# EAGLE board BMSV1.0 (EAGLE 9.2.1), part 1 of 2
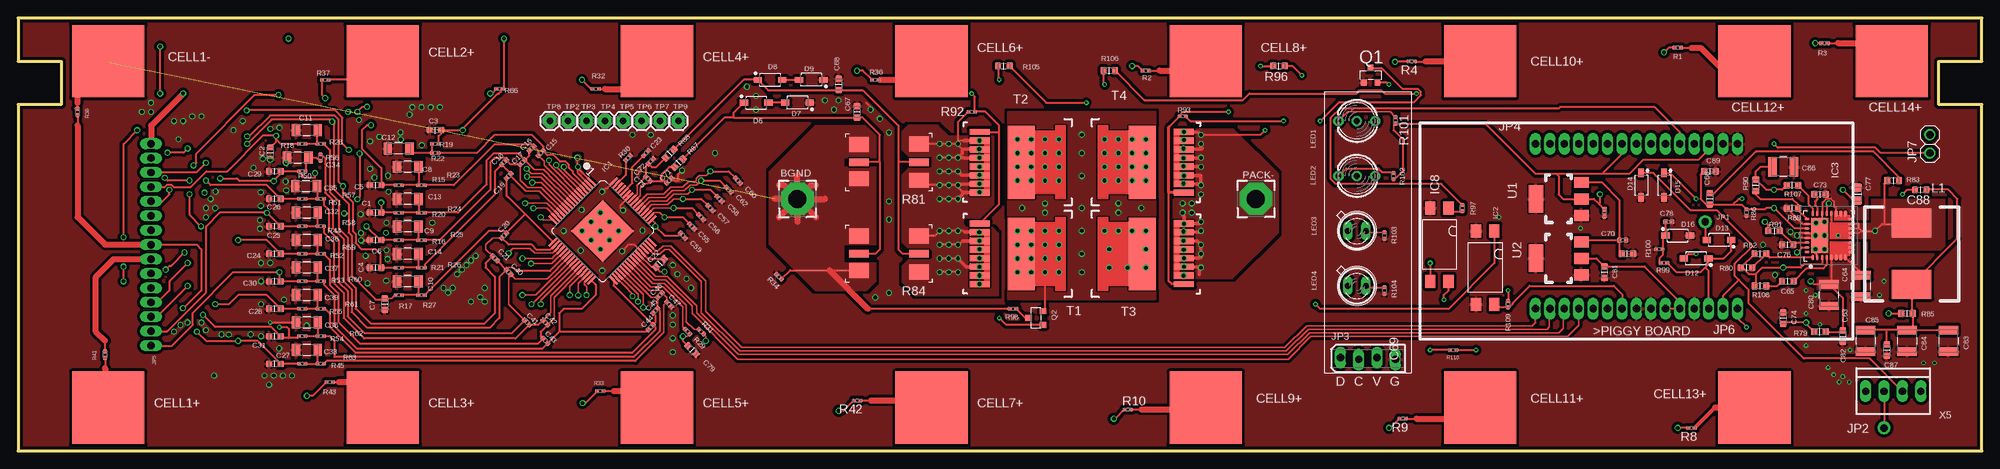
[diagram p0: board, top side]
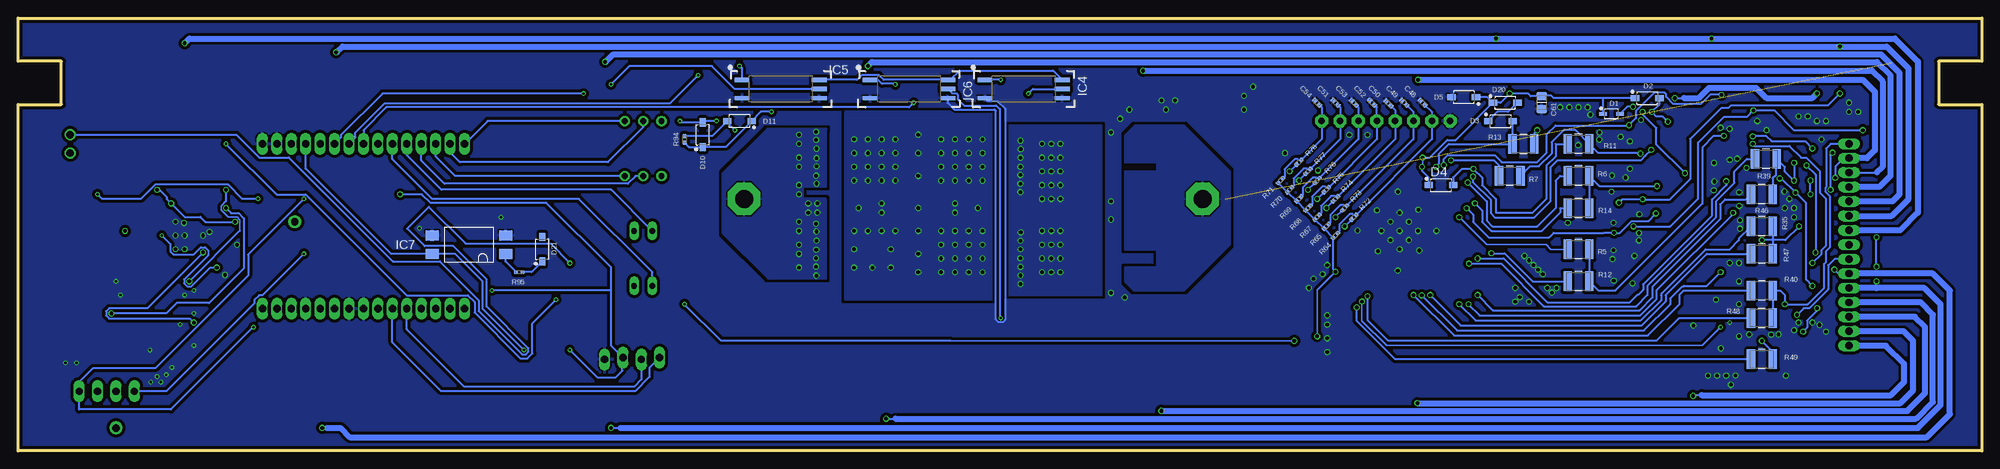
[diagram p1: board, bottom side, seen from below]

Size 272 x 60 mm. Coordinates in mm from the lower left corner, seen from the top.
Outline: 0,0 272,0 272,48 266,48 266,54 272,54 272,60 0,60 0,54 6,54 6,48 0,48 0,0
Copper layers (1*16): Top 0.035mm / dielectric 1.5mm / Bottom 0.035mm
Design rules "SeeedStudio_2layer_DRU_no_angle_20140221 *": minimum track width 6mil, minimum drill 12mil, track to track 10mil, track to pad 8mil, pad to pad 6mil, via to via 10mil, smd to smd 0mil, copper to edge 10mil, drill to drill 10mil, minimum pad ring 10mil, minimum via ring 6mil, stop-mask expansion 2mil, vias tented up to drill 100mil, thermal gap 10mil

## Footprints (pad centres in the part's own frame; a part is rotated, then mirrored left to right if it is on the bottom)
WPAD = drill 2.5 pad 4.5 octagon: 1 0,0
CAPC1608X92N = smd 0.9 x 0.95: 1 -0.8,0; 2 0.8,0
CAPC3215X168N = smd 1.15 x 1.65: 1 -1.5,0; 2 1.5,0
CAPC1005X60N = smd 0.65 x 0.65: 1 -0.45,0; 2 0.45,0
CAPC2012X145AN = smd 1.15 x 1.45: 1 -0.9,0; 2 0.9,0
CAPC3225X168N = smd 1.15 x 2.7: 1 -1.5,0; 2 1.5,0
CELL_PAD = smd 10 x 10: P$1 0,0
SOD2514X100N = smd 1.05 x 0.5: A 1.2,0; K -1.2,0
SOD3718X135N = smd 1.15 x 0.8: A 1.7,0; K -1.7,0
64PIN-LQFP = smd 1.55 x 0.3: 1 -5.93,3.75; 2 -5.93,3.25; 3 -5.93,2.75; 4 -5.93,2.25; 5 -5.93,1.75; 6 -5.93,1.25; 7 -5.93,0.75; 8 -5.93,0.25; 9 -5.93,-0.25; 10 -5.93,-0.75; 11 -5.93,-1.25; 12 -5.93,-1.75; 13 -5.93,-2.25; 14 -5.93,-2.75; 15 -5.93,-3.25; 16 -5.93,-3.75; 33 5.93,-3.75; 34 5.93,-3.25; 35 5.93,-2.75; 36 5.93,-2.25; 37 5.93,-1.75; 38 5.93,-1.25; 39 5.93,-0.75; 40 5.93,-0.25; 41 5.93,0.25; 42 5.93,0.75; 43 5.93,1.25; 44 5.93,1.75; 45 5.93,2.25; 46 5.93,2.75; 47 5.93,3.25; 48 5.93,3.75 | smd 0.3 x 1.55: 17 -3.75,-5.93; 18 -3.25,-5.93; 19 -2.75,-5.93; 20 -2.25,-5.93; 21 -1.75,-5.93; 22 -1.25,-5.93; 23 -0.75,-5.93; 24 -0.25,-5.93; 25 0.25,-5.93; 26 0.75,-5.93; 27 1.25,-5.93; 28 1.75,-5.93; 29 2.25,-5.93; 30 2.75,-5.93; 31 3.25,-5.93; 32 3.75,-5.93; 49 3.75,5.93; 50 3.25,5.93; 51 2.75,5.93; 52 2.25,5.93; 53 1.75,5.93; 54 1.25,5.93; 55 0.75,5.963; 56 0.25,5.93; 57 -0.25,5.93; 58 -0.75,5.93; 59 -1.25,5.93; 60 -1.75,5.93; 61 -2.25,5.93; 62 -2.75,5.93; 63 -3.25,5.93; 64 -3.75,5.93 | smd 6.1 x 6.1: 65 0,0
SFH = smd 1.4 x 1.8: 1 1.27,5.08; 2 -1.27,5.08; 3 -1.27,-5.08; 4 1.27,-5.08
VQFN-32 = smd 0.75 x 0.35: 1 -3.05,2.275; 2 -3.05,1.625; 3 -3.05,0.975; 4 -3.05,0.325; 5 -3.05,-0.325; 6 -3.05,-0.975; 7 -3.05,-1.625; 8 -3.05,-2.275; 17 3.05,-2.275; 18 3.05,-1.625; 19 3.05,-0.975; 20 3.05,-0.325; 21 3.05,0.325; 22 3.05,0.975; 23 3.05,1.625; 24 3.05,2.275 | smd 0.35 x 0.75: 9 -2.275,-3.05; 10 -1.625,-3.05; 11 -0.975,-3.05; 12 -0.325,-3.05; 13 0.325,-3.05; 14 0.975,-3.05; 15 1.625,-3.05; 16 2.275,-3.05; 25 2.275,3.05; 26 1.625,3.05; 27 0.975,3.05; 28 0.325,3.05; 29 -0.325,3.05; 30 -0.975,3.05; 31 -1.625,3.05; 32 -2.275,3.05 | smd 4.85 x 2.36: 33 0,1.27
SOP5 = smd 0.6 x 2.05: 1 -1.27,-5.355; 3 1.27,-5.355; 4 1.27,5.355; 5 0,5.355; 6 -1.27,5.355
1X01-CLEANBIG = drill 1.016 pad 1.778: 1 0,0
OLED-CON = drill 1.016 long: 1 0,0.127; 2 2.54,-0.127; 3 5.08,0.127; 4 7.62,-0.127
1X15 = drill 1.016 long: 1 -14,0; 2 -12,0; 3 -10,0; 4 -8,0; 5 -6,0; 6 -4,0; 7 -2,0; 8 0,0; 9 2,0; 10 4,0; 11 6,0; 12 8,0; 13 10,0; 14 12,0; 15 14,0
1X02 = drill 1.016: 1 -2.54,0; 2 0,0
MSS1278D/T = smd 5.5 x 4: 1 0,4.25; 2 0,-4.25
L-59EGW-CA = drill 0.8 pad 1.4: 1 0,2.54; 2 0,0; 3 0,-2.54
SFH482 = drill 0.813 long: A -1.27,0; K 1.27,0
MICRO3 = smd 0.8 x 0.9: 1 -0.95,-1; 2 0.95,-1; 3 0,1
RESC1005X40AN = smd 0.6 x 0.6: 1 -0.45,0; 2 0.45,0
RESC3225X70N = smd 1.15 x 2.7: 1 -1.5,0; 2 1.5,0
RESC1608X55N = smd 0.9 x 1: 1 -0.8,0; 2 0.8,0
SMD4 = smd 2.7 x 2.066: 1 -4.15,2.5; 3 -4.15,-2.5; 4 4.15,-2.45; 6 4.15,2.3 | smd 2.7 x 1.033: 2 -4.15,0; 5 4.15,0
PG-HSOF-9 = smd 0.8 x 2.8: 1 -4.2,-5.25; 2 -3,-5.25; 3 -1.8,-5.25; 4 -0.6,-5.25; 5 0.6,-5.25; 6 1.8,-5.25; 7 3,-5.25; 8 4.2,-5.25 | smd 10 x 3.7: 9 0,0.5
TP7035 = drill 0.9 pad 1.778 octagon: P$1 0,0
SOT-223 = smd 1.5 x 2: 1 -2.3,-3.15; 2 0,-3.15; 3 2.3,-3.15 | smd 3.8 x 2: 4 0,3.15
22-23-2041 = drill 1 long: 1 -3.81,0; 2 -1.27,0; 3 1.27,0; 4 3.81,0

## Placement (x,y rotation side)
BGND  [WPAD]  107.95,34.92 0 top
C1  0.047uF  [CAPC1608X92N]  49.53,33.02 180 top
C2  0.047uF  [CAPC1608X92N]  34.92,41.27 270 top
C3  0.047uF  [CAPC1608X92N]  57.79,44.45 180 top
C4  0.047uF  [CAPC1608X92N]  49.53,25.4 180 top
C5  0.047uF  [CAPC1608X92N]  49.53,36.83 180 top
C6  0.047uF  [CAPC1608X92N]  49.53,29.21 180 top
C7  0.047uF  [CAPC1608X92N]  50.8,20.32 270 top
C8  0.47uF  [CAPC3215X168N]  53.98,39.37 180 top
C9  0.47uF  [CAPC3215X168N]  53.98,31.11 180 top
C10  0.47uF  [CAPC3215X168N]  53.98,23.5 180 top
C11  0.47uF  [CAPC3215X168N]  40,44.45 180 top
C12  0.47uF  [CAPC3215X168N]  52.71,41.91 180 top
C13  0.47uF  [CAPC3215X168N]  53.97,34.91 180 top
C14  0.47uF  [CAPC3215X168N]  53.98,27.3 180 top
C15  0.047uF  [CAPC1005X60N]  72.39,41.27 225 top
C16  0.047uF  [CAPC1005X60N]  71.12,41.91 225 top
C17  0.047uF  [CAPC1005X60N]  69.85,40.01 225 top
C18  0.047uF  [CAPC1005X60N]  67.31,40.01 225 top
C19  0.047uF  [CAPC1005X60N]  67.94,38.1 225 top
C20  0.047uF  [CAPC1005X60N]  67.31,29.84 225 top
C21  0.047uF  [CAPC1005X60N]  66.04,26.67 315 top
C22  2.2uF  [CAPC1608X92N]  88.9,26.03 45 top
C23  .047uF  [CAPC1005X60N]  87,41.27 45 top
C24  0.047uF  [CAPC1608X92N]  35.56,27.3 180 top
C25  0.047uF  [CAPC1608X92N]  35.56,31.11 180 top
C26  0.047uF  [CAPC1608X92N]  35.56,34.93 180 top
C27  0.047uF  [CAPC1608X92N]  35.56,12.06 180 top
C28  0.047uF  [CAPC1608X92N]  35.56,19.69 180 top
C29  0.047uF  [CAPC1608X92N]  35.56,38.73 180 top
C30  0.047uF  [CAPC1608X92N]  35.56,23.48 180 top
C31  0.047uF  [CAPC1608X92N]  35.56,15.88 180 top
C32  0.47uF  [CAPC3215X168N]  40.01,33.02 180 top
C33  0.47uF  [CAPC3215X168N]  40.01,13.97 180 top
C34  0.47uF  [CAPC3215X168N]  38.73,40.64 180 top
C35  0.47uF  [CAPC3215X168N]  39.89,36.68 180 top
C36  0.47uF  [CAPC3215X168N]  40.01,29.2 180 top
C37  0.47uF  [CAPC3215X168N]  40.01,25.4 180 top
C38  0.47uF  [CAPC3215X168N]  40.01,17.78 180 top
C39  0.47uF  [CAPC3215X168N]  39.99,21.6 180 top
C40  0.047uF  [CAPC1005X60N]  67.94,24.77 315 top
C41  0.047uF  [CAPC1005X60N]  70.48,17.78 315 top
C42  0.047uF  [CAPC1005X60N]  73.03,17.78 315 top
C43  0.047uF  [CAPC1005X60N]  73.03,15.24 315 top
C44  0.047uF  [CAPC1005X60N]  87.63,17.14 45 top
C45  0.047uF  [CAPC1005X60N]  88.27,19.43 45 top
C46  0.047uF  [CAPC1005X60N]  88.9,21.59 45 top
C47  0.047uF  [CAPC1005X60N]  90.17,20.32 315 top
C48  2200pF  [CAPC1005X60N]  77.47,48.26 135 bottom
C49  2200pF  [CAPC1005X60N]  80.01,48.26 135 bottom
C50  2200pF  [CAPC1005X60N]  82.2,48.15 135 bottom
C51  2200pF  [CAPC1005X60N]  89.53,48.26 135 bottom
C52  2200pF  [CAPC1005X60N]  84.46,48.26 135 bottom
C53  2200pF  [CAPC1005X60N]  87,48.26 135 bottom
C54  2200pF  [CAPC1005X60N]  92.08,48.26 135 bottom
C55  1000pF  [CAPC1005X60N]  93.34,31.11 315 top
C56  1000pF  [CAPC1005X60N]  94.61,32.38 315 top
C57  1000pF  [CAPC1005X60N]  95.89,33.66 315 top
C58  1000pF  [CAPC1005X60N]  97.16,34.92 315 top
C59  1000pF  [CAPC1005X60N]  92.08,29.84 315 top
C60  1000pF  [CAPC1005X60N]  99.69,37.47 315 top
C61  0.22uF  [CAPC2012X145AN]  60.96,48.26 270 bottom
C62  1000pF  [CAPC1005X60N]  98.42,36.2 315 top
C63  0.1uF 100V  [CAPC1608X92N]  252.73,15.88 90 top
C64  2.2uF 100V  [CAPC3225X168N]  255.27,22.86 90 top
C65  0.1uF 100V  [CAPC1608X92N]  245.11,23.5 180 top
C66  47nF  [CAPC1608X92N]  234.31,34.92 270 top
C67  47nF  [CAPC1608X92N]  116.2,46.99 90 top
C68  47nF  [CAPC1608X92N]  113.67,50.8 90 top
C69  10uF  [CAPC1005X60N]  219.71,33.02 90 top
C70  10uF  [CAPC1005X60N]  222.25,29.21 180 top
C71  47nF  [CAPC1005X60N]  90.17,37.47 45 top
C72  47nF  [CAPC1005X60N]  87.63,40.14 45 top
C73  1uF  [CAPC1608X92N]  249.56,35.56 0 top
C74  47nF  [CAPC1608X92N]  244.47,18.41 90 top
C75  6.8uF  [CAPC1005X60N]  87.27,37.73 135 top
C76  2.2uF  [CAPC1608X92N]  245.1,28.57 180 top
C77  4.7uF  [CAPC2012X145AN]  254.64,35.57 90 top
C78  0.1uF  [CAPC1005X60N]  228.6,31.75 180 top
C79  0.1uF  [CAPC1608X92N]  93.34,13.97 315 top
C80  2.2uF 100V  [CAPC3225X168N]  250.82,21.59 90 top
C81  10uF  [CAPC1608X92N]  219.71,24.77 90 top
C82  10uF  [CAPC1608X92N]  222.88,27.3 180 top
C83  47uF 16V  [CAPC3225X168N]  267.33,15.24 270 top
C84  47uF 16V  [CAPC3225X168N]  261.62,15.24 270 top
C85  47uF 16V  [CAPC3225X168N]  255.91,15.24 270 top
C86  2.2uF 100V  [CAPC3225X168N]  244.47,39.37 180 top
C87  0.1uF 16V  [CAPC1608X92N]  258.83,13.97 90 top
C88  4700pF 50V  [CAPC1608X92N]  263.52,36.2 180 top
C89  10pF 50V  [CAPC1608X92N]  234.31,38.73 0 top
CELL1+  GF_BMS_CELL_PADP_PAD  [CELL_PAD]  12.5,6 0 top
CELL1-  GF_BMS_CELL_PADP_PAD  [CELL_PAD]  12.5,54 0 top
CELL2+  GF_BMS_CELL_PADP_PAD  [CELL_PAD]  50.5,54 0 top
CELL3+  GF_BMS_CELL_PADP_PAD  [CELL_PAD]  50.5,6 0 top
CELL4+  GF_BMS_CELL_PADP_PAD  [CELL_PAD]  88.5,54 0 top
CELL5+  GF_BMS_CELL_PADP_PAD  [CELL_PAD]  88.5,6 0 top
CELL6+  GF_BMS_CELL_PADP_PAD  [CELL_PAD]  126.5,54 0 top
CELL7+  GF_BMS_CELL_PADP_PAD  [CELL_PAD]  126.5,6 0 top
CELL8+  GF_BMS_CELL_PADP_PAD  [CELL_PAD]  164.5,54 0 top
CELL9+  GF_BMS_CELL_PADP_PAD  [CELL_PAD]  164.5,6 0 top
CELL10+  GF_BMS_CELL_PADP_PAD  [CELL_PAD]  202.5,54 0 top
CELL11+  GF_BMS_CELL_PADP_PAD  [CELL_PAD]  202.5,6 0 top
CELL12+  GF_BMS_CELL_PADP_PAD  [CELL_PAD]  240.5,54 0 top
CELL13+  GF_BMS_CELL_PADP_PAD  [CELL_PAD]  240.5,6 0 top
CELL14+  GF_BMS_CELL_PADP_PAD  [CELL_PAD]  259.5,54 0 top
D1  43V  [SOD2514X100N]  51.31,46.74 0 bottom
D2  33V  [SOD3718X135N]  46.35,48.9 0 bottom
D3  8.2V  [SOD3718X135N]  66.67,45.72 0 bottom
D4  20V  [SOD3718X135N]  74.93,36.83 0 bottom
D5  75V  [SOD3718X135N]  71.75,49.02 180 bottom
D6  2v  [SOD3718X135N]  102.22,48.26 0 top
D7  2v  [SOD3718X135N]  107.95,48.26 180 top
D8  2v  [SOD3718X135N]  104.14,51.44 0 top
D9  2v  [SOD3718X135N]  109.86,51.44 180 top
D10  [SOD3718X135N]  177.16,43.81 90 bottom
D11  8.2v  [SOD3718X135N]  172.09,45.72 180 bottom
D12  [SOD3718X135N]  232.41,26.67 180 top
D13  [SOD3718X135N]  235.59,29.21 180 top
D14  [SOD3718X135N]  224.79,36.83 270 top
D15  [SOD3718X135N]  227.97,36.83 270 top
D16  [SOD3718X135N]  229.87,29.84 0 top
D20  8.2V  [SOD3718X135N]  66.04,48.26 0 bottom
D21  8.2V  [SOD3718X135N]  199.39,27.94 90 bottom
IC1  MC33771BEP  [64PIN-LQFP]  80.95,30.48 315 top
IC2  SFH6156-1  [SFH]  203.2,25.4 0 top
IC3  MIC28515V1  [VQFN-32]  250.82,29.85 90 top
IC4  FOD8384-COC  [SOP5]  132.72,50.16 270 bottom
IC5  FOD8384-COC  [SOP5]  166.37,50.16 270 bottom
IC6  FOD8384-COC  [SOP5]  148.6,50.16 270 bottom
IC7  SFH6156-1  [SFH]  209.55,28.57 270 bottom
IC8  SFH6156-1  [SFH]  196.85,28.57 0 top
JP1  [1X01-CLEANBIG]  233.68,31.75 0 top
JP2  [1X01-CLEANBIG]  258.44,3.17 0 top
JP3  [OLED-CON]  183.14,12.8 0 top
JP4  [1X15]  224.16,42.55 0 top
JP5  [1X15]  18.41,28.57 90 top
JP6  [1X15]  224.16,19.68 0 top
JP7  [1X02]  264.8,43.81 90 top
L1  MSS1278-D  [MSS1278D/T]  262.25,27.3 0 top
LED1  L-59EGW-CAGR  [L-59EGW-CA]  185.42,45.72 90 top
LED2  L-59EGW-CAGR  [L-59EGW-CA]  185.42,38.1 90 top
LED3  SFH48225  [SFH482]  185.42,30.48 0 top
LED4  SFH48225  [SFH482]  185.42,22.86 0 top
PACK-  [WPAD]  171.45,34.92 0 top
Q1  IRLML5203  [MICRO3]  187.32,52.07 0 top
Q2  IRLML5203  [MICRO3]  140.97,18.41 90 top
R1  [RESC1005X40AN]  229.87,55.88 180 top
R2  [RESC1005X40AN]  156.21,52.7 180 top
R3  [RESC1005X40AN]  250.19,56.52 180 top
R4  [RESC1005X40AN]  193.04,53.98 180 top
R5  39E  [RESC3225X70N]  55.88,27.94 180 bottom
R6  39E  [RESC3225X70N]  55.88,38.1 180 bottom
R7  100  [RESC3225X70N]  65.41,38.1 180 bottom
R8  [RESC1005X40AN]  231.78,3.17 180 top
R9  [RESC1005X40AN]  191.77,4.45 180 top
R10  [RESC1005X40AN]  153.67,5.71 0 top
R11  39E  [RESC3225X70N]  55.88,42.55 180 bottom
R12  39E  [RESC3225X70N]  55.88,23.5 180 bottom
R13  39E  [RESC3225X70N]  63.5,42.55 0 bottom
R14  39E  [RESC3225X70N]  55.88,33.66 180 bottom
R15  3k  [RESC1005X40AN]  52.71,36.83 0 top
R16  3k  [RESC1005X40AN]  52.7,29.21 0 top
R17  3k  [RESC1005X40AN]  52.7,21.59 0 top
R18  3k  [RESC1005X40AN]  39.37,42.55 0 top
R19  3k  [RESC1005X40AN]  57.79,42.55 180 top
R20  3k  [RESC1005X40AN]  52.7,33.01 0 top
R21  3k  [RESC1005X40AN]  52.7,25.4 0 top
R22  2k  [RESC1005X40AN]  57.78,41.27 0 top
R23  2k  [RESC1005X40AN]  55.88,36.83 0 top
R24  2k  [RESC1005X40AN]  55.88,33.02 0 top
R25  2k  [RESC1005X40AN]  55.88,29.21 0 top
R26  2k  [RESC1005X40AN]  55.88,25.4 0 top
R27  2k  [RESC1005X40AN]  55.88,21.59 0 top
R28  2k  [RESC1005X40AN]  41.91,42.55 0 top
R29  10k  [RESC1005X40AN]  92.71,16.51 315 top
R30  10k  [RESC1005X40AN]  84.45,40.64 45 top
R31  127E  [RESC1005X40AN]  94.61,16.51 315 top
R32  [RESC1005X40AN]  80.01,50.16 180 top
R33  [RESC1005X40AN]  80.64,8.26 180 top
R34  0R  [RESC1005X40AN]  105.41,24.13 135 top
R35  39E  [RESC3225X70N]  30.48,31.11 180 bottom
R36  [RESC1005X40AN]  118.75,51.44 180 top
R37  [RESC1005X40AN]  42.55,51.44 180 top
R38  [RESC1005X40AN]  8.26,46.99 270 top
R39  39E  [RESC3225X70N]  29.92,40.46 180 bottom
R40  39E  [RESC3225X70N]  30.48,22.23 180 bottom
R41  [RESC1005X40AN]  12.06,13.34 90 top
R42  [RESC1005X40AN]  116.2,6.99 180 top
R43  [RESC1005X40AN]  43.18,9.53 180 top
R44  3k  [RESC1005X40AN]  39.37,31.11 0 top
R45  3k  [RESC1005X40AN]  39.37,12.06 0 top
R46  39E  [RESC3225X70N]  30.48,35.56 180 bottom
R47  39E  [RESC3225X70N]  30.48,27.3 180 bottom
R48  39E  [RESC3225X70N]  30.48,18.41 180 bottom
R49  39E  [RESC3225X70N]  30.48,12.7 180 bottom
R50  3k  [RESC1005X40AN]  39.37,38.73 0 top
R51  3k  [RESC1005X40AN]  39.37,34.93 0 top
R52  3k  [RESC1005X40AN]  39.37,27.3 0 top
R53  3k  [RESC1005X40AN]  39.37,23.5 0 top
R54  3k  [RESC1005X40AN]  39.37,15.88 0 top
R55  3k  [RESC1005X40AN]  39.37,19.68 0 top
R56  2k  [RESC1005X40AN]  41.91,40.64 90 top
R57  2k  [RESC1005X40AN]  41.91,34.92 0 top
R58  2k  [RESC1005X40AN]  41.91,31.11 0 top
R59  2k  [RESC1005X40AN]  41.91,27.3 0 top
R60  2k  [RESC1005X40AN]  41.91,23.5 0 top
R61  2k  [RESC1005X40AN]  41.91,19.68 0 top
R62  2k  [RESC1005X40AN]  41.91,15.88 0 top
R63  2k  [RESC1005X40AN]  41.91,12.06 0 top
R64  10k  [RESC1005X40AN]  89.53,29.84 225 bottom
R65  10k  [RESC1005X40AN]  90.81,31.11 225 bottom
R66  10  [RESC1005X40AN]  66.67,50.16 180 top
R67  10k  [RESC1005X40AN]  92.08,32.38 225 bottom
R68  10k  [RESC1005X40AN]  93.34,33.66 225 bottom
R69  10k  [RESC1005X40AN]  94.61,34.92 225 bottom
R70  10k  [RESC1005X40AN]  95.89,36.2 225 bottom
R71  10k  [RESC1005X40AN]  97.16,37.47 225 bottom
R72  1k  [RESC1005X40AN]  87,32.38 45 bottom
R73  1k  [RESC1005X40AN]  88.27,33.66 45 bottom
R74  1k  [RESC1005X40AN]  89.53,34.92 45 bottom
R75  1k  [RESC1005X40AN]  90.81,36.2 45 bottom
R76  1k  [RESC1005X40AN]  92.08,37.47 45 bottom
R77  1k  [RESC1005X40AN]  93.34,38.73 45 bottom
R78  1k  [RESC1005X40AN]  94.61,40.01 45 bottom
R79  127E  [RESC1608X55N]  249.56,16.51 180 top
R80  1.6k  [RESC1608X55N]  239.4,25.4 180 top
R81  LRMAP3920SUNT  [SMD4]  120.65,40.01 180 top
R82  1.6k  [RESC1608X55N]  241.3,27.3 180 top
R83  16.2k  [RESC1608X55N]  259.71,37.47 0 top
R84  LRMAP3920SUNT  [SMD4]  120.65,27.3 180 top
R85  10k  [RESC1608X55N]  261.62,19.05 180 top
R86  380E  [RESC1005X40AN]  239.4,33.02 270 top
R87  127E  [RESC1608X55N]  91.5,39.91 225 top
R88  127E  [RESC1608X55N]  90.25,41.2 225 top
R89  100k  [RESC1608X55N]  245.75,33.65 180 top
R90  200k  [RESC1608X55N]  240.67,36.83 90 top
R91  1R  [RESC1608X55N]  243.21,30.48 0 top
R92  10k  [RESC1005X40AN]  132.08,46.99 0 top
R93  10k  [RESC1005X40AN]  161.29,46.35 0 top
R94  10k  [RESC1005X40AN]  179.69,43.18 270 bottom
R95  127E  [RESC1005X40AN]  202.56,24.77 180 bottom
R96  127E  [RESC1608X55N]  174.62,53.34 180 top
R97  127E  [RESC1005X40AN]  200.03,33.66 270 top
R98  10k  [RESC1005X40AN]  137.79,19.68 0 top
R99  2.2k  [RESC1005X40AN]  227.97,26.04 180 top
R100  56k  [RESC1005X40AN]  227.33,27.94 180 top
R101  10k  [RESC1005X40AN]  190.75,45.81 270 top
R102  10k  [RESC1005X40AN]  190.5,38.1 270 top
R103  10k  [RESC1005X40AN]  189.23,29.84 270 top
R104  10k  [RESC1005X40AN]  189.23,22.23 270 top
R105  127E  [RESC1608X55N]  136.53,53.34 180 top
R106  127E  [RESC1608X55N]  151.13,52.7 180 top
R107  100k  [RESC1608X55N]  245.75,36.83 180 top
R108  0R  [RESC1608X55N]  241.3,22.86 180 top
R109  10K  [RESC1005X40AN]  206.38,20.32 90 top
R110  10K  [RESC1005X40AN]  198.75,13.97 180 top
S1  PGBRD6030-6030  [PIG6030]  224.16,30.48 0 top
T1  IPT020N10N3V1  [PG-HSOF-9]  138.43,27.3 270 top
T2  IPT020N10N3V1  [PG-HSOF-9]  138.43,40.01 270 top
T3  IPT020N10N3V1  [PG-HSOF-9]  156.21,27.3 90 top
T4  IPT020N10N3V1  [PG-HSOF-9]  156.21,40.01 90 top
TP2  TPTH7035  [TP7035]  76.2,45.72 0 top
TP3  TPTH7035  [TP7035]  78.74,45.72 0 top
TP4  TPTH7035  [TP7035]  81.28,45.72 0 top
TP5  TPTH7035  [TP7035]  83.82,45.72 0 top
TP6  TPTH7035  [TP7035]  86.36,45.72 0 top
TP7  TPTH7035  [TP7035]  88.9,45.72 0 top
TP8  TPTH7035  [TP7035]  73.66,45.72 0 top
TP9  TPTH7035  [TP7035]  91.44,45.72 0 top
U1  NCP1117LP-PG  [SOT-223]  213.36,34.92 90 top
U2  NCP1117LP-PG  [SOT-223]  213.36,26.67 90 top
X5  22-23-2041  [22-23-2041]  259.71,8.26 0 top

## Library data of the parts
BGND PACK- TP2-TP9 = simpa
C1-C89 = ipc-7351-capacitor
CELL1+ CELL1- CELL2+ CELL3+ CELL4+ CELL5+ CELL6+ CELL7+ CELL8+ CELL9+ CELL10+ CELL11+ CELL12+ CELL13+ IC1 IC3-IC6 JP3-JP7 L1 LED1-LED4 R81 R84 S1 T1-T4 U1 U2 = GreenFuel
CELL14+ = GreenFuel; SPICEPREFIX: X
D1-D16 D20 D21 = ipc-7351-diode
IC2 IC7 IC8 = optocoupler; MF: VISHAY/TELEFUNKEN; MPN: SFH6156-4T; OC_FARNELL: 1612479; OC_NEWARK: 21H7733
JP1 JP2 = adafruit
Q1 Q2 = transistor-power
R1-R80 R82 R83 R85-R110 = ipc-7351-resistor
X5 = GreenFuel; MF: MOLEX; MPN: 22-23-2041; OC_FARNELL: 1462920; OC_NEWARK: 38C0355

## Nets
3.3V: C69.2 JP3.3 JP4.7 JP4.13 R101.2 R102.2 R109.2 R110.2 U1.2
5V: C81.2 JP6.10 JP6.11 U2.2
15V_AUX: C70.2 C82.2 U1.3 U2.3
+15V: IC4.6 IC5.6 IC6.6
BGND: BGND.1 CELL1-.P$1 R34.1 R38.1 R81.4 R81.6 R84.4 R84.6 R98.1
BST: C65.1 IC3.4
CANH: D15.K JP6.15 X5.4
CANL: D14.K JP6.14 X5.3
CB_1: IC1.36 R49.2
CB_2: IC1.34 R48.2
CB_2/1_C: C31.1 IC1.35 JP5.7 R41.2 R54.1
CB_3: IC1.31 R40.2
CB_3/2_C: C28.1 JP5.15 R37.2 R40.1 R48.1 R55.1
CB_4: IC1.29 R47.2
CB_4/3_C: C30.1 IC1.30 JP5.1 R43.2 R53.1
CB_5: IC1.26 R35.2
CB_5/4_C: C24.1 JP5.14 R32.2 R35.1 R47.1 R52.1
CB_6: IC1.24 R46.2
CB_6/5_C: C25.1 IC1.25 JP5.2 R33.2 R44.1
CB_7: IC1.21 R39.2
CB_7/6_C: C26.1 JP5.13 R36.2 R39.1 R46.1 R51.1
CB_8: IC1.19 R12.2
CB_8/7_C: C29.1 D1.A IC1.20 JP5.3 R42.2 R50.1
CB_9: IC1.16 R5.2
CB_9/8_C: C2.1 JP5.12 R2.2 R5.1 R12.1 R18.1
CB_10: IC1.14 R14.2
CB_10/9_C: C7.1 D2.A IC1.15 JP5.4 R10.1 R17.1
CB_11: IC1.11 R6.2
CB_11/10_C: C4.1 JP5.11 R4.2 R6.1 R14.1 R21.1
CB_12: D4.A IC1.9 R11.2
CB_12/11_C: C6.1 IC1.10 JP5.5 R9.2 R16.1
CB_13: IC1.6 R7.2
CB_13/12_C: C1.1 JP5.10 R1.2 R7.1 R11.1 R20.1
CB_14: D3.A IC1.4 R13.1
CB_14+/14_C: C3.1 JP5.9 R3.2 R13.2 R19.1 R66.1
CB_14/13_C: C5.1 IC1.5 JP5.6 R8.2 R15.1
CELL1+: CELL1+.P$1 R41.1
CELL1-: C27.1 JP5.8 R38.2 R45.1 R49.1
CELL2+: CELL2+.P$1 R37.1
CELL3+: CELL3+.P$1 R43.1
CELL4+: CELL4+.P$1 R32.1
CELL5+: CELL5+.P$1 R33.1
CELL6+: CELL6+.P$1 R36.1
CELL7+: CELL7+.P$1 R42.1
CELL8+: CELL8+.P$1 R2.1
CELL9+: CELL9+.P$1 R10.2
CELL10+: CELL10+.P$1 R4.1
CELL11+: CELL11+.P$1 R9.1
CELL12+: CELL12+.P$1 R1.1
CELL13+: CELL13+.P$1 R8.1
CELL14+: CELL14+.P$1 R3.1
CHG_FET: IC5.5 Q1.2
CHG_GATE: JP4.9 R96.1
CSB: IC1.41 JP6.4
CT_1: C45.2 C46.1 IC1.37 R62.2
CT_2: C44.2 C45.1 IC1.33 R61.2
CT_3: C43.2 C44.1 IC1.32 R60.2
CT_4: C42.2 C43.1 IC1.28 R59.2
CT_5: C41.2 C42.1 IC1.27 R58.2
CT_6: C40.2 C41.1 IC1.23 R57.2
CT_7: C21.2 C40.1 IC1.22 R56.2
CT_8: C20.2 C21.1 IC1.18 R28.2
CT_9: C19.2 C20.1 IC1.17 R27.2
CT_10: C18.2 C19.1 IC1.13 R26.2
CT_11: C17.2 C18.1 IC1.12 R25.2
CT_12: C16.2 C17.1 IC1.8 R24.2
CT_13: C15.2 C16.1 IC1.7 R23.2
CT_14: C15.1 IC1.3 R22.2
CT_REF: C46.2 C47.1 IC1.38 R63.2
DSG_FET: IC4.5 R92.2 T1.1 T2.1
DSG_GATE: JP4.8 R105.1
FB: C66.2 C88.2 C89.1 IC3.27 R85.2 R86.1
FLOUT: IC2.4 JP6.7 R109.1
GATE: D10.K D11.K R93.1 R94.2 T3.1 T4.1
GND: C1.2 C2.2 C3.2 C4.2 C5.2 C6.2 C7.2 C8.2 C9.2 C10.2 C11.2 C12.2 C13.2 C14.2 C22.2 C23.2 C24.2 C25.2 C26.2 C27.2 C28.2 C29.2 C30.2 C31.2 C32.2 C33.2 C34.2 C35.2 C36.2 C37.2 C38.2 C39.2 C47.2 C48.2 C49.2 C50.2 C51.2 C52.2 C53.2 C54.2 C55.2 C56.2 C57.2 C58.2 C59.2 C60.2 C61.2 C62.2 C63.1 C64.1 C67.2 C68.2 C69.1 C70.1 C71.2 C72.2 C73.2 C74.2 C76.2 C77.2 C78.1 C79.2 C80.1 C81.1 C82.1 C83.2 C84.2 C85.2 C86.1 C87.1 C89.2 D5.A D7.K D9.K D14.A D15.A D16.A IC1.44 IC1.58 IC1.59 IC1.64 IC1.65 IC2.2 IC2.3 IC3.2 IC3.16 IC3.17 IC3.18 IC3.19 IC3.22 IC3.26 IC3.28 IC3.29 IC3.33 IC4.3 IC4.4 IC5.3 IC5.4 IC6.3 IC6.4 IC7.2 IC7.3 IC8.2 JP3.4 JP4.14 JP4.15 JP6.8 JP6.9 JP6.12 Q1.1 R30.2 R34.2 R86.2 R89.2 R100.2 R103.2 R104.2 TP8.P$1 U1.1 U1.4 U2.1 U2.4
GPIO0: C59.1 IC1.49 R72.1
GPIO1: C55.1 IC1.50 R73.1
GPIO2: C56.1 IC1.51 R74.1
GPIO3: C57.1 IC1.52 R75.1
GPIO4: C58.1 IC1.53 R76.1
GPIO5: C62.1 IC1.54 R77.1
GPIO6: C60.1 IC1.55 R78.1
ILIM: IC3.1 R80.1 R82.1
INTL_IN2: D12.A X5.1
INTL_OUT1: JP2.1 X5.2
ISENSE+: C71.1 C75.1 IC1.56 R87.2
ISENSE-: C72.1 C75.2 IC1.57 R88.2
KEY-IN: D12.K D13.K JP6.13 R99.1
MISO: IC1.42 JP6.3
MOSI: IC1.47 JP6.1
N$1: C12.1 R19.2 R22.1
N$2: C11.1 R18.2 R28.1
N$3: D8.A D9.A
N$4: C14.1 R21.2 R26.1
N$5: C13.1 R20.2 R24.1
N$6: C8.1 R15.2 R23.1
N$7: C10.1 R17.2 R27.1
N$8: C32.1 R44.2 R58.1
N$9: C9.1 R16.2 R25.1
N$10: C38.1 R54.2 R62.1
N$11: D6.A D7.A
N$12: IC3.24 R107.1
N$13: C65.2 R108.1
N$14: IC8.4 JP7.1
N$15: IC8.3 JP7.2
N$16: C37.1 R53.2 R60.1
N$17: IC3.25 R89.1 R90.1
N$18: C73.1 IC3.23
N$19: D10.A Q1.3 R93.2
N$20: IC4.1 R105.2
N$21: C74.1 IC3.31 R79.2
N$23: C36.1 R52.2 R59.1
N$24: C66.1 R83.2
N$25: IC7.1 R95.2
N$26: D3.K D20.A
N$27: IC8.1 R97.2
N$28: Q2.3 R98.2
N$30: IC1.40 R31.1
N$31: IC2.1 R31.2
N$33: IC5.1 R96.2
N$34: IC1.39 R29.1
N$35: IC6.1 R106.2
N$36: D21.K R95.1
N$38: C35.1 R51.2 R57.1
N$41: C34.1 R50.2 R56.1
N$46: C39.1 R55.2 R61.1
N$48: C33.1 R45.2 R63.1
N$49: C48.1 R64.1 R72.2 TP2.P$1
N$50: C49.1 R65.1 R73.2 TP3.P$1
N$51: C50.1 R67.1 R74.2 TP4.P$1
N$52: C52.1 R68.1 R75.2 TP5.P$1
N$53: C53.1 R69.1 R76.2 TP6.P$1
N$54: C51.1 R70.1 R77.2 TP7.P$1
N$55: C54.1 R71.1 R78.2 TP9.P$1
N$68: C67.1 D6.K R81.5 R84.5 R87.1
N$70: C68.1 D8.K R81.2 R84.2 R88.1
N$71: LED1.1 R101.1
N$72: LED4.K R104.1
N$73: LED3.K R103.1
N$74: LED2.1 R102.1
N$78: D13.A JP1.1
OLED_SCL: JP3.2 JP6.5
OLED_SDA: JP3.1 JP6.6
PCHG_FET: IC6.5 Q2.1
PCHG_GATE: JP4.10 R106.1
PVDD: C77.1 IC3.21 R91.1
PWR_DRAIN: Q2.2 T1.9 T2.9 T3.9 T4.9
RDD: IC7.4 JP4.12 R110.1
RESET: IC1.63 R30.1
S-LED_1: JP4.1 LED1.3
S-LED_2: JP4.2 LED1.2
S-LED_3: JP4.3 LED2.3
S-LED_4: JP4.4 LED2.2
S-LED_5: JP4.5 LED3.A
S-LED_6: JP4.6 LED4.A
SCLK: IC1.46 JP6.2
SGNL: D21.A
SGNL1: JP4.11 R97.1
SW: IC3.3 IC3.12 IC3.13 IC3.14 IC3.15 IC3.20 L1.1 R80.2 R82.2 R83.1 R108.2
V+: D11.A PACK-.1 R94.1 T3.2 T3.3 T3.4 T3.5 T3.6 T3.7 T3.8 T4.2 T4.3 T4.4 T4.5 T4.6 T4.7 T4.8
V-: R81.1 R81.3 R84.1 R84.3 R92.1 T1.2 T1.3 T1.4 T1.5 T1.6 T1.7 T1.8 T2.2 T2.3 T2.4 T2.5 T2.6 T2.7 T2.8
VANA: C23.1 IC1.60
VCC: C83.1 C84.1 C85.1 C87.2 C88.1 L1.2 R85.1
VCOM: C22.1 C79.1 IC1.43 R29.2 R64.2 R65.2 R67.2 R68.2 R69.2 R70.2 R71.2
VDD: C76.1 IC3.30 R91.2
VIN: C63.2 C64.2 C80.2 C86.2 IC3.5 IC3.6 IC3.7 IC3.8 IC3.9 IC3.10 IC3.11 R79.1 R90.2 R107.2
VPWR: C61.1 D1.K D2.K D4.K D5.K D20.K IC1.1 IC1.2 R66.2
WAKE: C78.2 D16.K R99.2 R100.1